# Altium PCB PCB.PcbDoc
Units mil, origin at the board's own origin, x right, y up, seen from the top; angles counter-clockwise.
Board outline 1574.8 x 2755.91 mil, 2 copper layers (Top Layer, Bottom Layer), stack 61.855 mil thick; 31 components, 24 nets, 138 pads, 18 vias.
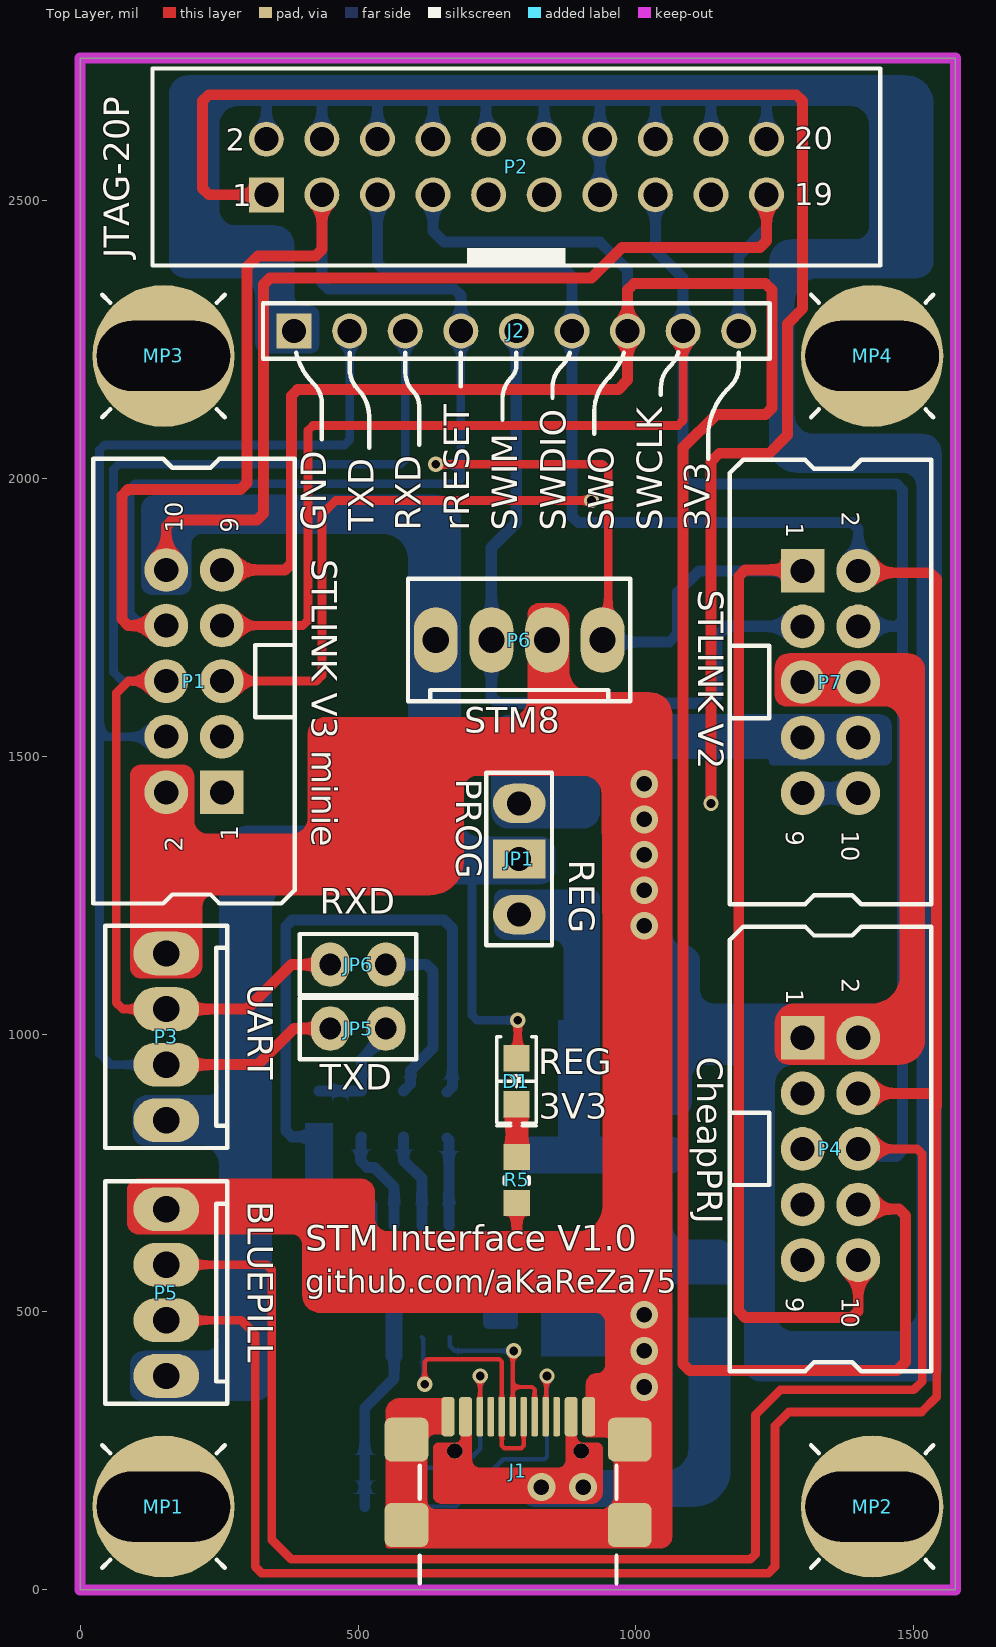
[diagram p0: Top Layer view]
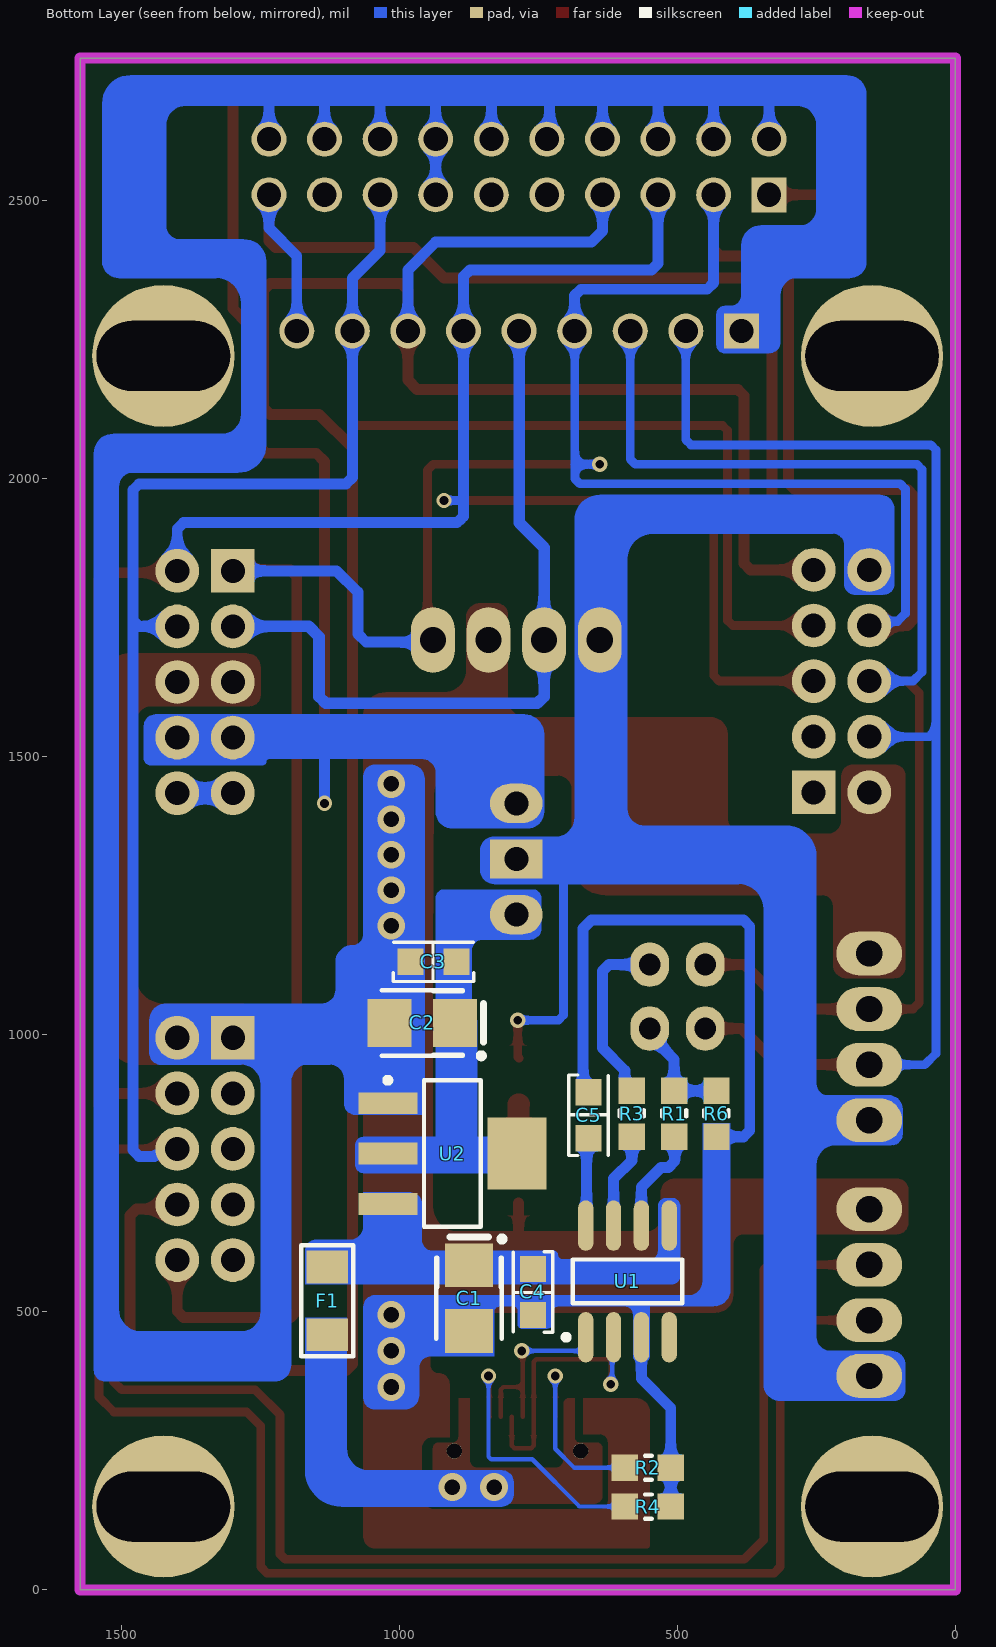
[diagram p1: Bottom Layer view, seen from below]
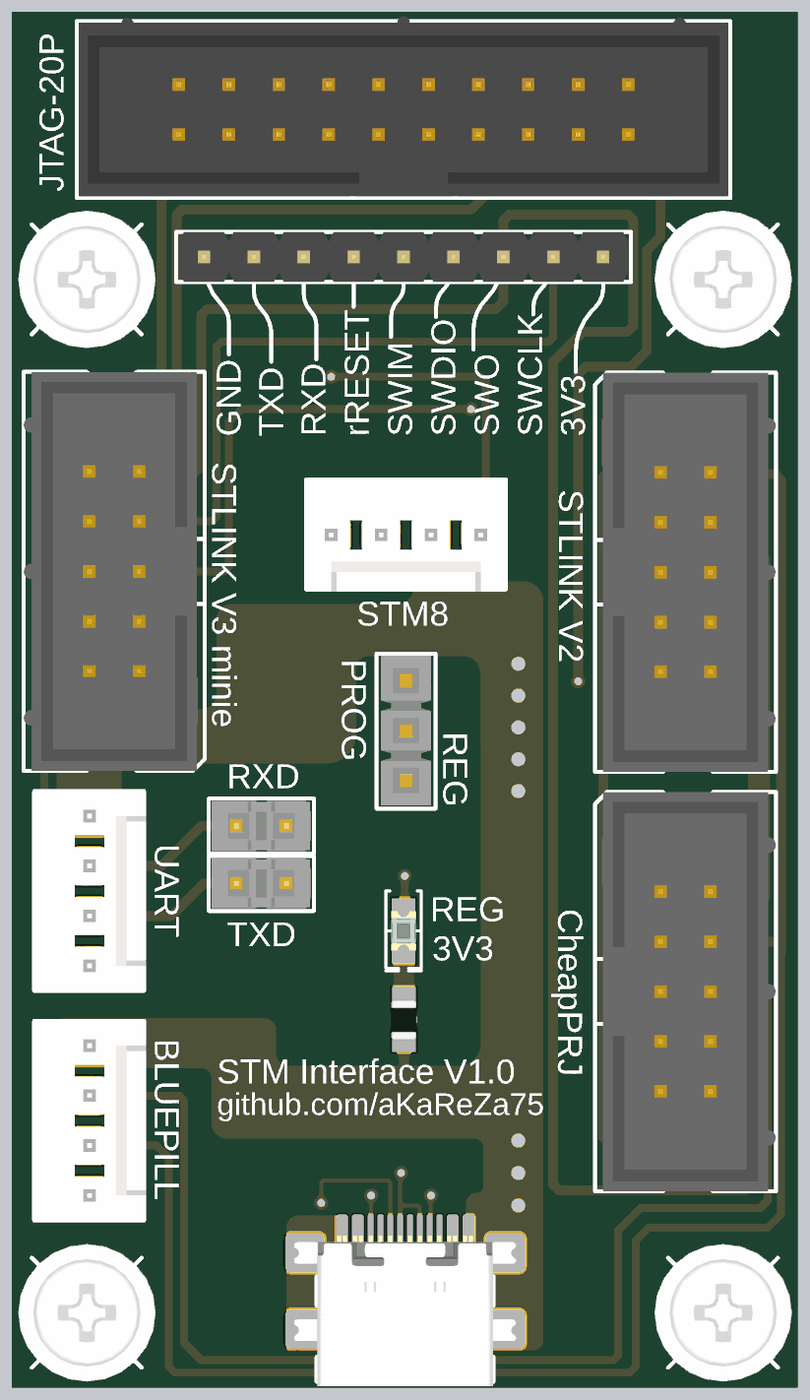
[diagram p2: 3D render of the assembled board from above, using the file's embedded part models]
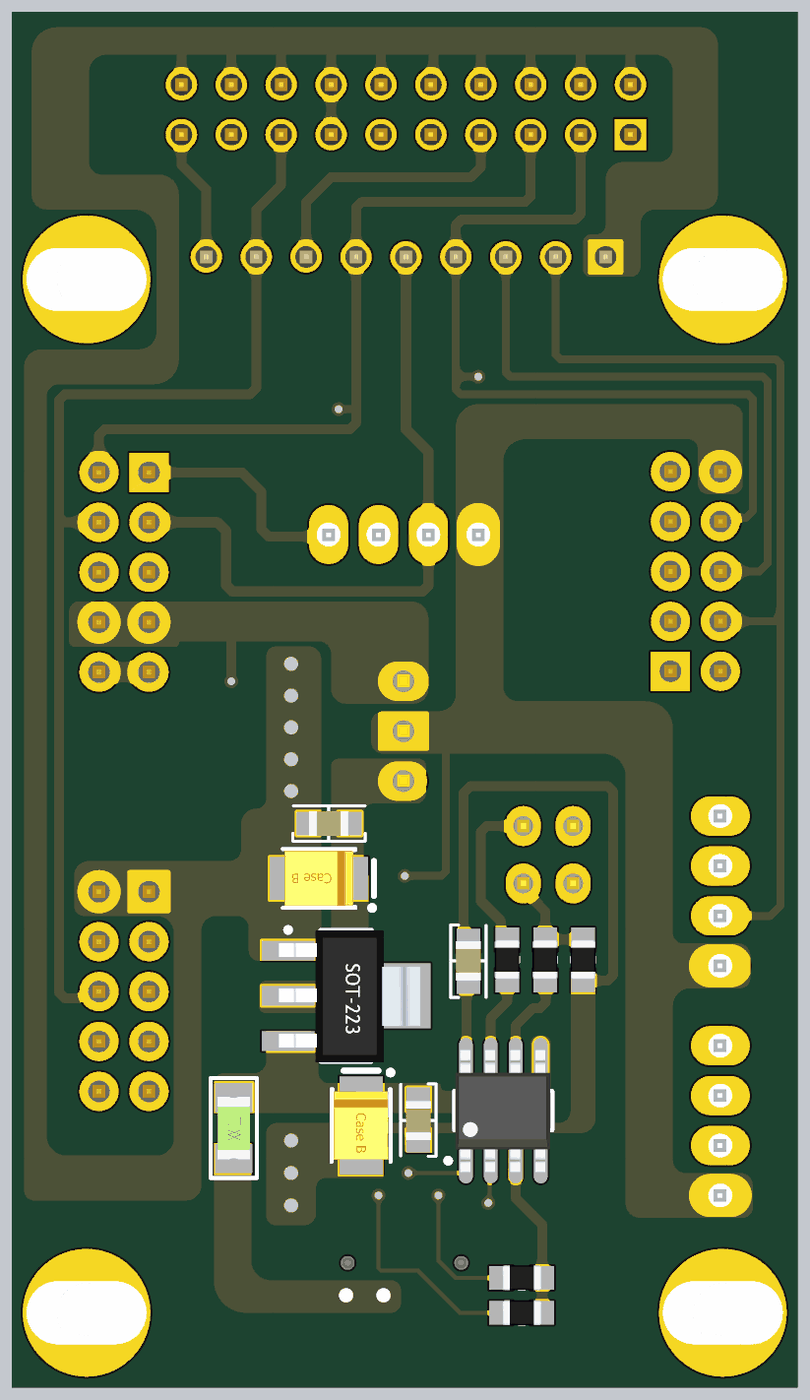
[diagram p3: 3D render of the assembled board from below, using the file's embedded part models]

## Layer stack, top to bottom
Top Solder: solder mask 0.4, Solder Resist, Dk 3.5
Top Layer: signal copper 1.4
Dielectric 1: dielectric 59.0551, FR-4, Dk 4.8
Bottom Layer: signal copper 1.4
Bottom Solder: solder mask 0.4, Solder Resist, Dk 3.5

## Board outline
0,0 0,2755.91 1574.8,2755.91 1574.8,0

## Design rules (kind name [scope] priority, off if disabled: settings)
AcuteAngle [All] p1: minimum=6.00000000000000E+0001 checktracksonly=TRUE
AssemblyTestPointUsage [All] p1 off:
AssemblyTestpoint [All] p1 off: testpointundercomponent=TRUE minsize=40 maxsize=100 preferedsize=60 minholesize=0 maxholesize=40 preferedholesize=32 testpointgrid=1 usegrid=TRUE gridtolerance=0.01 allowsidetop=TRUE allowsidebottom=TRUE
BoardOutlineClearance [All] p1: gap=7.87 ignorepadtopadclearanceinfootprint=FALSE
Clearance Poly_Clearance [All vs InPolygon] p1: gap=9.84 ignorepadtopadclearanceinfootprint=TRUE except(11.81: Arc-Hole Track-Hole SMDPad-Hole THPad-Hole Via-Hole Fill-Hole Poly-Hole Region-Hole Text-Hole)
Clearance [All] p2: gap=7.87 ignorepadtopadclearanceinfootprint=FALSE except(11.81: Arc-Hole Track-Hole SMDPad-Hole THPad-Hole Via-Hole Fill-Hole Poly-Hole Region-Hole Text-Hole)
FabricationTestPointUsage [All] p1 off: valid=0 allowmultiple=FALSE
FabricationTestpoint [All] p1 off: side=3 testpointundercomponent=TRUE minsize=40 maxsize=100 preferedsize=60 minholesize=0 maxholesize=40 preferedholesize=32 testpointgrid=1 allowsidetop=TRUE allowsidebottom=TRUE usegrid=TRUE gridtolerance=0.01
HoleSize [All] p1: absolutevalues=TRUE maxlimit=393.7 minlimit=15.75 maxpercent=80.000 minpercent=20.000
HoleToHoleClearance [All] p1: gap=11.81 allowstackedmicrovias=TRUE
MinimumAnnularRing [All] p1: minimumring=5.91
MinimumSolderMaskSliver [All] p1: minsoldermaskwidth=0.39
PolygonConnect [All] p1: thpad.connectstyle=Relief thpad.reliefconductorwidth=15.75 thpad.reliefentries=4 thpad.polygonreliefangle="90 Angle" thpad.airgapwidth=15.75 smdpad.connectstyle=Relief smdpad.reliefconductorwidth=15.75 smdpad.reliefentries=4 smdpad.polygonreliefangle="90 Angle" smdpad.airgapwidth=15.75 via.connectstyle=Direct via.reliefconductorwidth=10 via.reliefentries=4 via.polygonreliefangle="90 Angle" via.airgapwidth=10
RoutingVias [All] p1: holewidth=15.75 width=27.56 viastyle="Through Hole" minholewidth=15.75 minwidth=27.56 maxholewidth=118.11 maxwidth=236.22
SMDNeckDown [All] p1: percent=50.000
SilkToSilkClearance [All] p1: silktosilkclearance=0
SilkToSolderMaskClearance [IsPad] p1: minsilkscreentomaskgap=0.39 clearancetoexposedcopper=TRUE
SolderMaskExpansion [All] p1: expansion=4 istentingtop=FALSE
Width [All] p1: maxlimit=393.7 minlimit=7.87 preferedwidth=15.75
21 further rules are at their usual default settings.

## Components (designator, comment, footprint, x,y, rotation, side; value= is the part's Value field where it differs from the comment)
C1 "10u" SMT_C_Tantalum_B 875,525 r270 bottom
C2 "10u" SMT_C_Tantalum_B 959.17,1020 r0 bottom
C3 "100n" "CAP 0805/2012" 940,1130 r0 bottom
C4 "DS1307" "CAP 0805/2012" 760,535 r270 bottom value=100n
C5 "10n" "CAP 0805/2012" 660,855 r90 bottom
D1 "Green" "LED 0805/2012 GREEN" 785,915 r270 top
F1 "0.25A" 1206_F 1130,520 r90 bottom
J1 "16b" "USBC_SMD_16_USB4110 - Extended" 780,280 r180 top
J2 "9" HDR_THT_9M_2.54mm 785,2265 r0 top
JP1 "0b" "jumper selector" 790,1215 r90 top
JP5 "2'Pin" "Jumper Small - 2.54 - GRAY" 500,1010 r180 top
JP6 "2'Pin" "Jumper Small - 2.54 - GRAY" 500,1125 r180 top
MP1 "M3" SCREW-M3 150,150 r0 top
MP2 "M3" SCREW-M3 1425,150 r0 top
MP3 "M3" SCREW-M3 150,2220 r0 top
MP4 "M3" SCREW-M3 1425,2220 r0 top
P1 "STLinkV3-minie" IDC2.54-10PIN 205,1635 r90 top
P2 "JTAG-20P" BOX-HDR-10X2-2.54mm-S 785,2560 r0 top
P3 "UART" "MOLEX KK 0022272041" 155,995 r90 top
P4 "STLINK V2" IDC2.54-10PIN 1350,793.43 r270 top
P5 "BluePill" "MOLEX KK 0022272041" 155,535 r90 top
P6 "STM8" "MOLEX KK 0022272041" 790,1708.93 r0 top
P7 "STLinkV2" IDC2.54-10PIN 1350,1633.43 r270 top
R1 "560b" "RES 0805 (2012X06L)" 506.06,890 r270 bottom
R2 "4.7K" "RES 0805 (2012X06L)" 520,220 r0 bottom
R3 "560b" "RES 0805 (2012X06L)" 582.12,890 r270 bottom
R4 "4.7K" "RES 0805 (2012X06L)" 520,150 r0 bottom
R5 "220b" "RES 0805 (2012X06L)" 785.76,704.02 r90 top
R6 "1K" "RES 0805 (2012X06L)" 430,890 r270 bottom
U1 "CH340N" SO8_narrow_m 590,555 r90 bottom
U2 "AMS1117-3V3" SOT223_M 905,785 r180 bottom

## Footprints (in the part's own frame and the unit in brackets; to place one, negate y for a bottom-side part, rotate by r counter-clockwise, add the part's x,y. Pads: shape width x height; smd on the part's side, far side on the other; paste and mask are expansions set on the pad)
1206_F [mm] "Surface mount FUSE 1206"
  rect 1.5x1.9 smd: 1(-1.55,0) 2(1.55,0)
  silkscreen extent -2.54,-1.18 2.54,1.18, body extent -1.6,-0.83 1.6,0.83, height 0.56
BOX-HDR-10X2-2.54mm-S [mm] "20 pins, straight, gold plating"
  rect 1.6x1.6 hole 1.1: 1(-11.43,-1.27)
  round 1.6 hole 1.1: 2(-11.43,1.27) 3(-8.89,-1.27) 4(-8.89,1.27) 5(-6.35,-1.27) 6(-6.35,1.27) 7(-3.81,-1.27) 8(-3.81,1.27) 9(-1.27,-1.27) 10(-1.27,1.27) 11(1.27,-1.27) 12(1.27,1.27) 13(3.81,-1.27) 14(3.81,1.27) 15(6.35,-1.27) 16(6.35,1.27) 17(8.89,-1.27) 18(8.89,1.27) 19(11.43,-1.27) 20(11.43,1.27)
  silkscreen extent -16.63,-4.5 16.63,4.5, body extent -16.53,-4.42 16.53,4.75, height 9.13
"CAP 0805/2012" [mm] "Chip Capacitor, 2-Leads, Body 2.00x1.20mm, IPC Medium Density"
  rect 1.2x1.2 smd: 1(-1.075,0) 2(1.025,0)
  silkscreen extent -1.86,-0.9 1.82,0.9, body extent -1,-0.64 1,0.64, height 1.26
HDR_THT_9M_2.54mm [mm] "Pin Header, pitch 2.54 mm, THT, Vertical, single row, 9p"
  rect 1.6x1.6 hole 1.1: 1(-10.16,0)
  round 1.6 hole 1.1: 2(-7.62,0) 3(-5.08,0) 4(-2.54,0) 5(0,0) 6(2.54,0) 7(5.08,0) 8(7.62,0) 9(10.16,0)
  silkscreen extent -11.58,-1.27 11.58,1.27, body extent -11.43,-1.27 11.43,1.27, height 8.57
IDC2.54-10PIN [mm] "Connector; IDC, Low Profile Male Header, Thru-Hole; 10 Position; Vertical; Pitch 2.54 mm; 20.32 x 9.2 x 9.45 mm (LxWxH) DESIGNER : ABBAS BASEREH"
  rect 2x2 hole 1.1: 1(-5.08,-1.27)
  round 2 hole 1.1: 2(-5.08,1.27) 3(-2.54,-1.27) 4(-2.54,1.27) 5(0,-1.27) 6(0,1.27) 7(2.54,-1.27) 8(2.54,1.27) 9(5.08,-1.27) 10(5.08,1.27)
  silkscreen extent -10.16,-4.6 10.16,4.6, body extent -10.15,-4.25 10.15,4.6, height 9.17
"jumper selector" [mm]
  oval 1.8x2.4 hole 1.1: 1(0,0) 3(5.08,0)
  rect 1.8x2.4 hole 1.1: 2(2.54,0)
  silkscreen extent -1.4,-1.5 6.48,1.5, body extent -1.24,-1.27 6.38,1.27, height 10.16
"Jumper Small - 2.54 - GRAY" [mil]
  oval 70x80 hole 39.37: 1(-50,0) 2(50,0)
  silkscreen extent -105,-55 105,55, body extent -100,-50 100,50, height 337
"LED 0805/2012 GREEN" [mm] "Chip Diode, 2-Leads, Body 2.00x1.25mm, IPC Medium Density"
  rect 1.2x1.2 smd: 1(-1.05,0) 2(1.05,0)
  silkscreen extent -2.03,-0.9 2.03,0.9, body extent -1,-0.62 1,0.63, height 0.9
"MOLEX KK 0022272041" [mm]
  oval 2x3 hole 1.2: 1(-3.81,0) 2(-1.27,0) 3(1.27,0) 4(3.81,0)
  silkscreen extent -5.08,-2.79 5.08,2.79, body extent -5.08,-2.9 5.08,2.9, height 11.7
"RES 0805 (2012X06L)" [mm] "Chip Resistor, 2-Leads, Body 2.0x1.3mm, IPC High Density _ (0.100 W)"
  rect 1.2x1.2 smd: 1(-0.2,0) 2(1.9,0)
  silkscreen extent 0.67,-0.55 0.98,0.55, body extent -0.19,-0.63 1.84,0.64, height 0.6
SCREW-M3 [mm]
  round 6.5 hole 3.2 slot 6.096 at 0 deg: 1(0,0)
  silkscreen extent -2.79,-2.79 2.79,2.79, body extent -3.49,-3.5 3.51,3.5, height 2.32
SMT_C_Tantalum_B [mm] "Capacitor, SM Tantalum; Body 3.5 x 2.8 mm (LxW typ)"
  rect 2x2.2 smd: 1(-1.5,0) 2(1.5,0)
  silkscreen extent -2.82,-1.5 1.85,1.62, body extent -1.75,-1.4 1.75,1.4, height 1.9
SO8_narrow_m [mm] "8-Pin Small Outline Package (SO8), IPC Low Density"
  oval 2.3x0.7 smd: 1(-2.55,1.905) 2(-2.55,0.635) 3(-2.55,-0.635) 4(-2.55,-1.905) 5(2.55,-1.905) 6(2.55,-0.635) 7(2.55,0.635) 8(2.55,1.905)
  silkscreen extent -2.67,-2.5 1,2.93, body extent -3.12,-2.39 3.07,2.44, height 1.7
SOT223_M [mm] "SOT223, 4-Leads, Body 6.5x3.5mm, Pitch 2.3mm, Lead Span 7mm, IPC Low Density"
  rect 2.7x1 smd: 1(-2.95,2.3) 2(-2.95,0) 3(-2.95,-2.3)
  rect 2.7x3.3 smd: 4(2.95,0)
  silkscreen extent -3.08,-3.35 1.3,3.47, body extent -3.42,-3.38 3.78,3.32, height 1.85
"USBC_SMD_16_USB4110 - Extended" [mm] "CONN, USB, Type C, USB4110"
  rrect50% 0.6x1.8 smd mask+0.075: A1B12(2.997,-0.805) A4B9(2.197,-0.805) B1A12(-3.428,-0.805) B4A9(-2.628,-0.805)
  rrect50% 0.3x1.8 smd mask+0.075: A5(1.043,-0.805) A6(0.041,-0.805) A7(-0.46,-0.805) A8(-1.461,-0.805) B5(-1.962,-0.805) B6(-0.961,-0.805) B7(0.542,-0.805) B8(1.544,-0.805)
  rrect30% 2x2 smd: S1(4.897,0.244) S2(-5.303,0.244) S3(4.897,4.144) S4(-5.303,4.144)
  round 0.7 hole 0.7 unplated: ""(-3.093,0.764) ""(2.687,0.764)
  silkscreen extent -4.7,1.45 4.3,6.81, body extent -5.85,-0.64 5.45,7.04, height 3.23

## Part data
C1 C2: library part Cap_Tantalum, "Tantalum Capacitor,TAJ Series-SMD", Package=Package?, Rating=6.3V, Inflow=inflow?, Type=Tantalum, Validation=Valid
C3 C4 C5: library part Cap_Multi_SMD_100nF_0805, "Bipolar ceramic capacitor SMD", Package=0805, Rating=50V, Inflow=inflow?, Type=MultiLayer
  C3: Validation=Valid
D1: library part Semi_LED_SMD, "LED", Package=Package?, Rating=Rating?, Inflow=inflow?, Type=LED, Validation=Valid
F1: library part Other_Elec_Fuse_SMD, "Short circiut  protection", Package=1206, Rating=Rating?, Inflow=0.5A, Type=Fast
J1: library part Con_USB_C_16P, "USB C Female Connector", Package=SMD, Rating=Rating?, Inflow=inflow?, Type=C, Validation=NT
J2: library part Con_MPH_9x1_V_THT_2.54, "Header, single row, 9 pin", Package=Package?, Rating=Rating?, Inflow=7152, Type=Type?, Validation=NT
JP1: library part SW_Other_JSelector_THT, "Jumper Selector", Package=Dip, Rating=Rating?, Inflow=5145, Type=Selector, Validation=Valid
JP5 JP6: library part SW_Other_Jumper, "Jumper", Package=Package?, Rating=Rating?, Inflow=5145, Type=Type?, Validation=Valid
MP1 MP2 MP3 MP4: library part Other_Mech_Screw, "Board Screw With Spacer", Package=Package?, Rating=Rating?, Inflow=8243, Type=Screw, Validation=Valid
P1: library part Con_Prog_STLinkV3_SWD, "STLINK-V3MINIE debugger/programmer IDC probe for STM32 microcontrollers", Package=Package?, Rating=Rating?, Inflow=7119, Type=SWD, Validation=NT
P2: library part Con_Prog_aKaReZa_JTAG_20, "10 Pin aKaReZa JTAG Programmer", Package=Package?, Rating=Rating?, Inflow=7134, Type=Type?, Validation=Valid
P3: library part Con_UART, "UART Connector", Package=Package?, Rating=Rating?, Inflow=4528, Type=Type?, Validation=NT
P4: library part Con_Prog_CheapProject, "STLINK-V2 debugger/programmer IDC probe for STM32 microcontrollers", Package=Package?, Rating=Rating?, Inflow=7119, Type=SWD, Validation=NT
P5: library part Con_Prog_BluePill, "Serial Wire 4'pin", Package=Package?, Rating=Rating?, Inflow=4528, Type=Type?, Validation=NT
P6: library part Con_Prog_STM8, "STM8 Programmer Connector", Package=Package?, Rating=Rating?, Inflow=4528, Type=Type?, Validation=NT
P7: library part Con_Prog_STLinkV2, "STLINK-V2 debugger/programmer IDC probe for STM32 microcontrollers", Package=Package?, Rating=Rating?, Inflow=7119, Type=SWD, Validation=NT
R1 R3 R6: library part Res_SMD, "Resistor", Inflow=01303
R2 R4 R5: library part Res_SMD_0805, "Resistor", Package=0805, Rating=0.125W, Inflow=inflow?, Type=10%
  R5: Validation=Valid
U1: library part IC_Converter_CH340N, "TTL To USB Chip", Package=SO-8, Rating=Rating?, Inflow=inflow?, Type="USB to TTL"
U2: library part IC_Reg_AMS1117_3.3, "1'A Positive voltage regulator", Package=SOT223, Rating=1A, Inflow=5217, Type=LDO, Validation=Valid

## Via types
v1: diameter 50, hole 28, Top Layer to Bottom Layer, tented both sides, 10 vias
v2: diameter 27.56, hole 15.75, Top Layer to Bottom Layer, tented both sides, 8 vias

## Nets (pads, with @x,y where several pads share a name; then routed paths per layer and width w, separated by ;. In a path a pad name is that pad's centre, name@x,y a point inside that pad or via, vN(x,y) a via of type N, cw(c..) or ccw(c..) an arc to the next point about the centre after c; other vN are vias at no path point)
+3V3: D1.1 J2.9 JP1.2 P1.10 P2.19 P3.1 P5.1 P6.1 | length 3126.6
  Top Layer w15.75: D1.1 787.4,958.74 v2(787.4,1025)
  Top Layer w19.68: P1.10 155,1913.47 166.53,1925 318.47,1925 330,1936.53 330,2348.47 341.53,2360 920,2360 975,2415 1223.47,2415 1235,2426.53 P2.19
  Bottom Layer w15.75: P1.10 155,1900 185,1930 605.78,1930 640,1895.78 P6.1 ; 705,1280 705,1034.23 714.23,1025 v2(787.4,1025)
  Bottom Layer w19.68: J2.9 1185,2400 1235,2450 P2.19
GND: C1.2 C2.2 C3.2 C4.2 C5.2 J1.A1B12 J1.B1A12 J1.S1 J1.S2 J1.S3 J1.S4 J2.1 P1.2 P2.2 P2.4 P2.6 P2.8 P2.10 P2.12 P2.13 P2.14 P2.16 P2.18 P2.20 P3.4 P4.1 P4.2 P5.4 P6.3 P7.5 P7.6 R2.1 R4.1 R5.1 R6.2 U1.3 U2.1 | length 2576.2
  Top Layer w19.68: 775,625 785.76,625 R5.1
  Top Layer w31.5: J1.S3 J1.S1 ; J1.S4 988.79,202.57 ; 988.79,203.45 J1.S2
  Bottom Layer w19.68: 330,2680 335,2680 P2.2 ; R6.2 381.53,815.2 370,826.73 370,1193.47 381.53,1205 655,1205 670,1190 670,905.34 C5.2 ; P2.4 435,2682.22 ; R4.1 R2.1 512.13,327.13 565,380 U1.3 ; P2.6 535,2680 ; P2.8 635,2680 ; 730,2680 730,2610 P2.10 ; P2.12 835,2678.08 ; 930,2685 935,2685 P2.14 P2.13 ; P2.16 1035,2680 ; P2.18 1135,2680 ; P2.20 1235,2680
  other v1: 1015,365 1015,430 1015,495 1015,1195 1015,1258.75 1015,1322.5 1015,1386.25 1015,1450
NetC2_1: C2.1 C3.1 JP1.1 U2.2 U2.4
NetC5_1: C5.1 U1.8 | length 159.3
  Bottom Layer w19.68: C5.1 663.49,809.17 663.49,656.9 U1.8
NetD1_2: D1.2 R5.2 | length 380.1
  Top Layer w39.37: D1.2 D1.2@785.76,873.66 ; R5.2 D1.2@785.76,873.66 ; R5.2 D1.2@785.76,873.66 ; R5.2 D1.2@785.76,873.66 ; R5.2 D1.2@785.76,873.66
NetF1_1: F1.1 J1. J1.A4B9 J1.B4A9
  other v1: 830,185 905,185
NetJ1_A6: J1.A6 J1.B6 U1.1 | length 343.3
  Top Layer w7.87: J1.A6 778.38,365 ; v2(780,430) 778.38,428.38 778.38,365 ; J1.B6 817.82,360.39 813.21,365 778.38,365
  Bottom Layer w7.87: U1.1 665,439.09 674.09,430 v2(780,430)
NetJ1_A7: J1.A7 J1.B7 U1.2 | length 515.7
  Top Layer w7.87: v2(620,370) 620,410.39 624.61,415 754.04,415 758.65,410.39 J1.B7 758.65,259.61 763.27,255 793.48,255 798.1,259.61 J1.A7
  Bottom Layer w7.87: U1.2 617.5,452.11 617.5,372.5 v2(620,370)
NetJ1_A8: J1.A8 R4.2 | length 502
  Top Layer w7.87: J1.A8 838.77,312.94 838.77,383.77 v2(840,385)
  Bottom Layer w7.87: R4.2 676.5,150 761.5,235 835.39,235 840,239.61 v2(840,385)
NetJ1_B8: J1.B8 R2.2 | length 343.9
  Top Layer w7.87: J1.B8 719.61,312.1 719.61,384.61 v2(720,385)
  Bottom Layer w7.87: R2.2 686.07,220 720,253.93 v2(720,385)
NetJP5_1: JP5.1 R1.1 R6.1 | length 206.4
  Bottom Layer w19.68: R6.1 R1.1 506.06,954.37 550,998.31 JP5.1
NetJP6_1: JP6.1 R3.1 | length 327.3
  Bottom Layer w19.68: JP6.1 623.47,1125 635,1113.47 635,975 594.81,934.81 594.81,910.57 R3.1
NetP7_9,10: P7.9 P7.10 | length 100
  Bottom Layer w39.37: P7.9 P7.10
NetR1_2: R1.2 U1.6 | length 193
  Bottom Layer w19.68: R1.2 505,814.14 505,771.53 516.53,760 530,760 565,725 U1.6
NetR3_2: R3.2 U1.7 | length 173.4
  Bottom Layer w19.68: R3.2 582.12,772.88 615,740 U1.7
RESET: J2.4 P1.8 P2.3 P4.10 P6.4 P7.1 | length 5710.9
  Top Layer w15.75: v2(640,2025) 939.46,2025 950,2014.46 950,1718.93 P6.4
  Top Layer w19.68: P1.8 86.53,1735 75,1746.53 75,1968.47 86.53,1980 288.47,1980 300,1991.53 300,2380 320,2400 423.47,2400 435,2411.53 P2.3 ; P7.1 1298.43,1835 1196.53,1835 1185,1823.47 1185,501.53 1196.53,490 1388.47,490 1400,501.53 P4.10
  Bottom Layer w15.75: P1.8 147.56,1742.44 104.09,1742.44 90,1756.53 90,1980.78 99.22,1990 675.78,1990 685,1999.23 685,2025 ; v2(640,2025) 685,2025 ; J2.4 685,2025
  Bottom Layer w19.68: P2.3 435,2351.53 446.53,2340 673.47,2340 685,2328.47 J2.4 ; P6.4 943.93,1705 1060,1705 1075,1720 1075,1795 1113.43,1833.43 P7.1
RXD: J2.3 JP6.2 P1.6 P3.3 | length 2315.3
  Top Layer w15.75: P3.3 76.53,1045 65,1056.53 65,1613.47 86.53,1635 P1.6
  Top Layer w19.68: P3.3 300,1045 380,1125 JP6.2
  Bottom Layer w15.75: P3.3 P3.3@160,1040 ; P1.6 76.53,1635 60,1651.53 60,2015.78 69.23,2025 575.78,2025 585,2034.23 J2.3
SWCLK: J2.8 P1.7 P2.15 P4.6 P5.3 P7.4 | length 6320.8
  Top Layer w15.75: P5.3 335.78,585 345,575.78 345,90 380,55 1205.78,55 1215,64.23 1215,315 1260,360 1500,360 1515,375 1515,784.2 1505.78,793.43 P4.6 ; P1.7 400.78,1735 410,1744.23 410,2085.78 419.23,2095 1075.78,2095 1085,2104.23 J2.8
  Bottom Layer w19.68: P2.15 1035,2410 1085,2360 J2.8 1085,2001.53 1096.53,1990 1468.47,1990 1480,1978.47 1480,1744.96 ; P4.6 1400,780 1402.13,782.13 1438.93,782.13 1441.06,780 1468.47,780 1480,791.53 1480,1744.96 ; P7.4 1468.47,1733.43 1480,1744.96
SWDIO: J2.6 P1.5 P2.5 P4.4 P5.2 P7.2 | length 6379.8
  Top Layer w15.75: P5.2 290,485 315,460 315,41.53 326.53,30 1238.47,30 1250,41.53 1250,295 1275,320 1513.79,320 1541.01,347.22 1541.01,870.84 ; P1.5 425,1635 435,1645 435,1935 460,1960 v2(920,1960) ; 1536.57,893.43 1541.01,888.99
  Top Layer w19.68: P4.4 1536.57,893.43 ; P7.2 1403.43,1830 1529.48,1830 1541.01,1818.47 1541.01,870.84
  Bottom Layer w15.75: 885,1960 v2(920,1960) ; 891.53,1925 896.53,1920
  Bottom Layer w19.68: P2.5 535,2386.53 546.53,2375 873.47,2375 885,2363.47 J2.6 885,1960 885,1931.53 891.53,1925 ; 896.53,1920 1388.47,1920 1400,1908.47 P7.2
SWIM: J2.5 P6.2 P7.3 | length 1362
  Bottom Layer w20.87: J2.5 785,1920 740,1875 P6.2 740,1607.22 752.22,1595 1132.78,1595 1145,1607.22 1145,1715 1163.43,1733.43 P7.3
SWO: J2.7 P1.9 P2.7 P4.8 | length 4851.6
  Top Layer w19.68: P1.9 368.47,1835 380,1846.53 380,2148.47 391.53,2160 968.47,2160 985,2176.53 J2.7 985,2338.47 996.53,2350 1233.47,2350 1245,2338.47 1245,2126.53 1233.47,2115 1145,2115 1085,2055 1085,406.53 1096.53,395 1470,395 1485,410 1485,673.47 1473.47,685 1408.43,685 P4.8
  Bottom Layer w19.68: P2.7 635,2445 655,2425 935,2425 985,2375 J2.7
TXD: J2.2 JP5.2 P1.4 P3.2 | length 2314.2
  Top Layer w19.68: P3.2 320,945 385,1010 JP5.2
  Bottom Layer w15.75: P3.2 55,945 35,965 35,1546.53 ; P1.4 46.53,1535 35,1546.53 ; J2.2 485,2069.23 475.78,2060 44.23,2060 35,2050.78 35,1546.53
VProg: JP1.3 P2.1 P7.7 P7.8 | length 2945.8
  Top Layer w19.68: P2.1 231.53,2510 220,2521.53 220,2678.47 231.53,2690 1288.47,2690 1300,2678.47 1300,2305 1272.56,2277.56 1272.56,2077.56 1240,2045 1150,2045 1135,2030 v2(1135,1415)
  Bottom Layer w19.68: v2(1135,1415) 1135,1510
  Bottom Layer w39.37: P7.7 P7.8
Vusb: C1.1 C4.1 F1.2 U1.5 U2.3
pads on no net: J1.A5 J1.B5 MP1.1 MP2.1 MP3.1 MP4.1 P1.1 P1.3 P2.9 P2.11 P2.17 P4.3 P4.5 P4.7 P4.9 U1.4

## Keep-outs
Keep-Out Layer:
  the board outline again, w19.68

## Other copper
Top Layer:
  region net GND: 1045,75 ccw(c1045,95) 1065,95 1065,275 1065,390 1065,450 1065,1575 ccw(c1025,1575) 1025,1615 920,1615 cw(c920,1655) 880,1655 880,1750 ccw(c855,1750) 855,1775 825,1775 ccw(c825,1755) 805,1755 805,1602.6 cw(c772.4,1602.6) 772.4,1570 440,1570 ccw(c440,1540) 410,1540 410,1390 cw(c380,1390) 380,1360 230,1360 cw(c230,1385) 205,1385 205,1465 ccw(c185,1465) 185,1485 110,1485 ccw(c110,1465) 90,1465 90,1120 ccw(c110,1120) 110,1100 195,1100 ccw(c195,1125) 220,1125 220,1230 cw(c240,1230) 240,1250 630,1250 ccw(c630,1310) 690,1310 690,1440 cw(c715,1440) 715,1465 845,1465 904.89,1465 cw(c904.9,1431.42) 938.47,1431.6 940,1145 940,690 cw(c895,690) 895,645 555,645 cw(c555,670) 530,670 530,715 ccw(c505,715) 505,740 105,740 ccw(c104.99,720.01) 85,720 85,660 ccw(c105,660) 105,640 380,640 cw(c380,620) 400,620 400,530 ccw(c431.55,530) 431.55,498.45 926.55,498.45 cw(c926.56,480) 945,480 945,405 cw(c930,404.99) 930,390 ccw(c929.99,370.01) 910,370 910,275 940,275 cw(c940,255) 960,255 960,170 cw(c935.01,169.99) 935,145 640,145 cw(c640,160) 625,160 625,265 cw(c640,265) 640,280 670,280 670,345 575,345 ccw(c575,320) 550,320 550,80 ccw(c555,80) 555,75
  region net GND: 1275,945 1475,945 ccw(c1475,990) 1520,990 1520,1655 ccw(c1490,1655) 1490,1685 1275,1685 ccw(c1275,1660) 1250,1660 1250,1610 ccw(c1270,1610) 1270,1590 1445,1590 cw(c1445,1560) 1475,1560 1475,1105 cw(c1425,1105) 1425,1055 1285,1055 ccw(c1285,1020) 1250,1020 1250,970 ccw(c1275,970)
  region net NetF1_1: 635,170 ccw(c650,170) 650,155 777.4,155 920,155 ccw(c920,175) 940,175 940,255 ccw(c930,255) 930,265 905,265 cw(c905,276.08) 893.92,276.08 893.92,344.67 873.92,344.67 873.92,233.92 cw(c860.01,233.91) 860,220 720,220 cw(c720,235) 705,235 705,335 ccw(c695.01,335) 695,345 685,345 685,275 cw(c675,274.99) 674.99,264.99 644.99,264.99 ccw(c644.99,255) 635,255
Bottom Layer:
  region net VProg: 770,1370 905,1370 ccw(c905,1400) 935,1400 935,1470 cw(c960,1470) 960,1495 1235,1495 cw(c1235,1490) 1240,1490 ccw(c1246.05,1490) 1246.05,1483.95 1448.95,1483.95 ccw(c1448.95,1495) 1460,1495 1460,1555 ccw(c1440.01,1555.01) 1440,1575 775,1575 ccw(c774.99,1540.01) 740,1540.01 740,1400 ccw(c770,1400)
  region net GND: 955,855 1080,855 ccw(c1080,874.99) 1100,875 1100,920 cw(c1125,920) 1125,945 1165,945 cw(c1165,915.01) 1195,915 1195,405 ccw(c1224.99,404.99) 1225,375 1530,375 ccw(c1530,395) 1550,395 1550,2045 ccw(c1515.01,2045) 1515,2080 1320,2080 cw(c1319.99,2114.99) 1285,2115 1285,2315 cw(c1330,2315) 1330,2360 1505,2360 ccw(c1505,2389.99) 1535,2390 1535,2675 ccw(c1485,2675) 1485,2725 195,2725 ccw(c195,2690) 160,2690 160,2670 160,2390 ccw(c190,2390) 190,2360 285,2360 cw(c285,2330) 315,2330 315,2245 ccw(c335,2245) 335,2225 415,2225 ccw(c415,2240) 430,2240 430,2295 ccw(c415,2295) 415,2310 405,2310 cw(c405,2330) 385,2330 385,2360 385,2420 ccw(c350,2420) 350,2455 280,2455 cw(c280,2485) 250,2485 250,2635 cw(c285,2635) 285,2670 1385,2670 cw(c1385,2635.01) 1420,2635 1420,2455 cw(c1395.01,2454.99) 1395,2430 1280,2430 ccw(c1279.99,2390.01) 1240,2390 1240,2060 ccw(c1290,2060) 1290,2010 1480,2010 cw(c1480,1985.01) 1505,1985 1505,505 cw(c1465.01,504.99) 1465,465 1285,465 cw(c1284.99,499.99) 1250,500 1250,910 cw(c1284.99,910) 1285,945 1430,945 ccw(c1430,965) 1450,965 1450,1025 ccw(c1420.01,1025) 1420,1055 1140,1055 cw(c1139.99,1079.99) 1115,1079.99 1115,1130 ccw(c1085.01,1130.01) 1085,1160 cw(c1084.99,1179.99) 1065,1180 1065,1465 ccw(c1045,1465) 1045,1485 980,1485 ccw(c980,1460) 955,1460
  region net +3V3: 110,340 315,340 ccw(c315,370) 345,370 345,435 345,1225 cw(c390,1225) 390,1270 830,1270 ccw(c830,1295) 855,1295 855,1330 ccw(c830,1330) 830,1355 720,1355 cw(c720,1390) 685,1390 685,1925 ccw(c640,1925) 640,1970 135,1970 ccw(c135,1945) 110,1945 110,1810 ccw(c130,1810) 130,1790 180,1790 ccw(c180,1810) 200,1810 200,1880 cw(c220,1880) 220,1900 545,1900 cw(c545,1855) 590,1855 590,1405 cw(c560,1405) 560,1375 305,1375 ccw(c305,1320) 250,1320 250,910 cw(c230,910) 230,890 120,890 ccw(c120,865) 95,865 95,820 ccw(c115,820) 115,800 215,800 cw(c215,765) 250,765 250,455 cw(c225,455) 225,430 115,430 ccw(c115,405) 90,405 90,360 ccw(c110,360)
  region net GND: 550,420 ccw(c560,420) 560,410 570,410 ccw(c570,420) 580,420 580,495 cw(c595,495) 595,510 715,510 cw(c715,500) 725,500 725,480 ccw(c735,480) 735,470 780,470 ccw(c780,477.4) 787.4,477.4 787.4,502.4 cw(c795,502.4) 795,510 820,510 cw(c820,500) 830,500 830,420 925,420 925,515 ccw(c910,515) 910,530 585,530 570,530 480,530 cw(c480,555) 455,555 455,840 405,840 405,540 ccw(c435,540) 435,510 550,510
  region net NetF1_1: 815,150 1105,150 ccw(c1105,215) 1170,215 1170,490 1095,490 1095,255 cw(c1055,255) 1055,215 920,215 875,215 815,215 ccw(c814.99,195.01) 795,195 795,170 ccw(c815,170)
  region net NetC2_1: 795,750 1065,750 ccw(c1065,764.99) 1080,765 1080,800 ccw(c1065.02,800.01) 1065,815 1050,815 935,815 935,1180 935,1245 ccw(c920,1245) 920,1260 760,1260 ccw(c760,1245) 745,1245 745,1190 ccw(c765,1190) 765,1170 850,1170 cw(c850,1150) 870,1150 870,1025 860,1025 860,815 795,815
  region net Vusb: 960,550 1065,550 1170,550 1170,610 ccw(c1150,610) 1150,630 1090,630 cw(c1090,655) 1065,655 1065,715 980,715 ccw(c980,695) 960,695 960,630 cw(c940,630) 940,610 722.38,610 ccw(c722.38,602.62) 715,602.62 cw(c707.38,602.62) 707.38,595 550,595 cw(c550,610) 535,610 535,690 ccw(c520,690) 520,705 510,705 ccw(c509.99,690.01) 495,690.01 495,565 ccw(c510,565) 510,550
  region net GND: 835,530 1044.8,530 cw(c1044.8,509.8) 1065,509.8 1065,345 cw(c1045,345) 1045,325 990,325 cw(c990,350) 965,350 965,400 ccw(c945,400) 945,420 830,420

## Silkscreen, mask and mechanical layers (free items; w line width, h text height)
Top Overlay:
  lines w7.87: 388.64,2225.57 ccw(c505.71,2255) 420.36,2169.64 cw(c385,2134.29) 435,2134.29 435,2070 ; 485,2225.57 485,2196.21 ccw(c536.21,2196.21) 500,2160 cw(c451.72,2111.72) 520,2111.72 520,2055 ; 585,2225.57 585,2191.21 ccw(c636.21,2191.21) 600,2155 cw(c575.86,2130.86) 610,2130.86 610,2060 ; 685,2165 685,2225.57 ; 760,2105 760,2143.79 cw(c811.21,2143.79) 775,2180 ccw(c750.86,2204.14) 785,2204.14 785,2225.57 ; 850,2145 850,2163.79 cw(c901.21,2163.79) 865,2200 ccw(c816.72,2248.28) 881.18,2225.75 ; 925,2080 925,2119.64 cw(c1010.36,2119.64) 950,2180 ccw(c865.5,2264.5) 978.66,2226.08 ; 1045,2150 1045,2163.79 cw(c1096.21,2163.79) 1060,2200 ccw(c1011.72,2248.28) 1076.43,2226.51 ; 1130,2035 1130,2075 cw(c1250.71,2075) 1165.36,2160.36 1170,2165 ccw(c1133.79,2201.21) 1185,2201.21 1185,2225.57
  text "JTAG-20P" at 103.38,2395.6 h78.74 r90
  text "GND" at 458.38,1905.75 h78.74 r90
  text "TXD" at 543.4,1905.75 h78.74 r90
  text "RXD" at 628.42,1905.75 h78.74 r90
  text "rRESET" at 715.19,1905.75 h78.74 r90
  text "SWIM" at 801.96,1905.75 h78.74 r90
  text "SWDIO" at 888.72,1905.75 h78.74 r90
  text "SWO" at 975.49,1905.75 h78.74 r90
  text "SWCLK" at 1062.26,1905.75 h78.74 r90
  text "3V3" at 1148.38,1905.75 h78.74 r90
  text "STLINK V3 minie" at 401.62,1854.25 h78.74 r270
  text "STLINK V2" at 1096.62,1799.25 h78.74 r270
  text "STM8" at 690.75,1526.62 h78.74
  text "PROG" at 661.62,1459.25 h78.74 r270
  text "REG" at 864.72,1313.82 h78.74 r270
  text "RXD" at 430.75,1200.75 h78.74
  text "UART" at 286.62,1089.25 h78.74 r270
  text "CheapPRJ" at 1094.74,959.25 h78.74 r270
  text "REG" at 824.52,912.25 h78.74
  text "TXD" at 430.99,884.51 h78.74
  text "3V3" at 824.76,832.4 h78.74
  text "BLUEPILL" at 286.62,699.25 h78.74 r270
  text "STM Interface V1.0" at 405,595 h78.74
  text "github.com/aKaReZa75" at 405,521.51 h70.87

## Text inside footprints (layer, text, board x,y; h text height)
J1: Mechanical 13 "PCB EDGE" at 1024.22,-13.09 h31.5 r180
P1: Top Overlay "9" at 284.53,1902.24 h31.5 r90; Top Overlay "10" at 184.53,1902.24 h31.5 r90; Top Overlay "1" at 284.53,1348.08 h31.5 r90; Top Overlay "2" at 184.53,1328.4 h31.5 r90
P2: Top Overlay "2" at 261.77,2589.13 h40; Top Overlay "1" at 273.58,2489.13 h40; Top Overlay "20" at 1284.61,2591.5 h40; Top Overlay "19" at 1284.61,2491.5 h40
P4: Top Overlay "9" at 1270.47,526.18 h31.5 r270; Top Overlay "10" at 1370.47,526.18 h31.5 r270; Top Overlay "1" at 1270.47,1080.35 h31.5 r270; Top Overlay "2" at 1370.47,1100.03 h31.5 r270
P7: Top Overlay "9" at 1270.47,1366.18 h31.5 r270; Top Overlay "10" at 1370.47,1366.18 h31.5 r270; Top Overlay "1" at 1270.47,1920.35 h31.5 r270; Top Overlay "2" at 1370.47,1940.03 h31.5 r270